# Altium PCB ESP32P4 SOM.PcbDoc (part 4 of 4)
Units mm, origin at the board's own origin, x right, y up, seen from the top; angles counter-clockwise.
Board outline 86.37 x 63.05 mm, 4 copper layers (L1-TOP, L2-GND, L3-GND/PWR, L4-BOT), stack 1.57 mm thick; 203 components, 172 nets, 736 pads, 1001 vias.
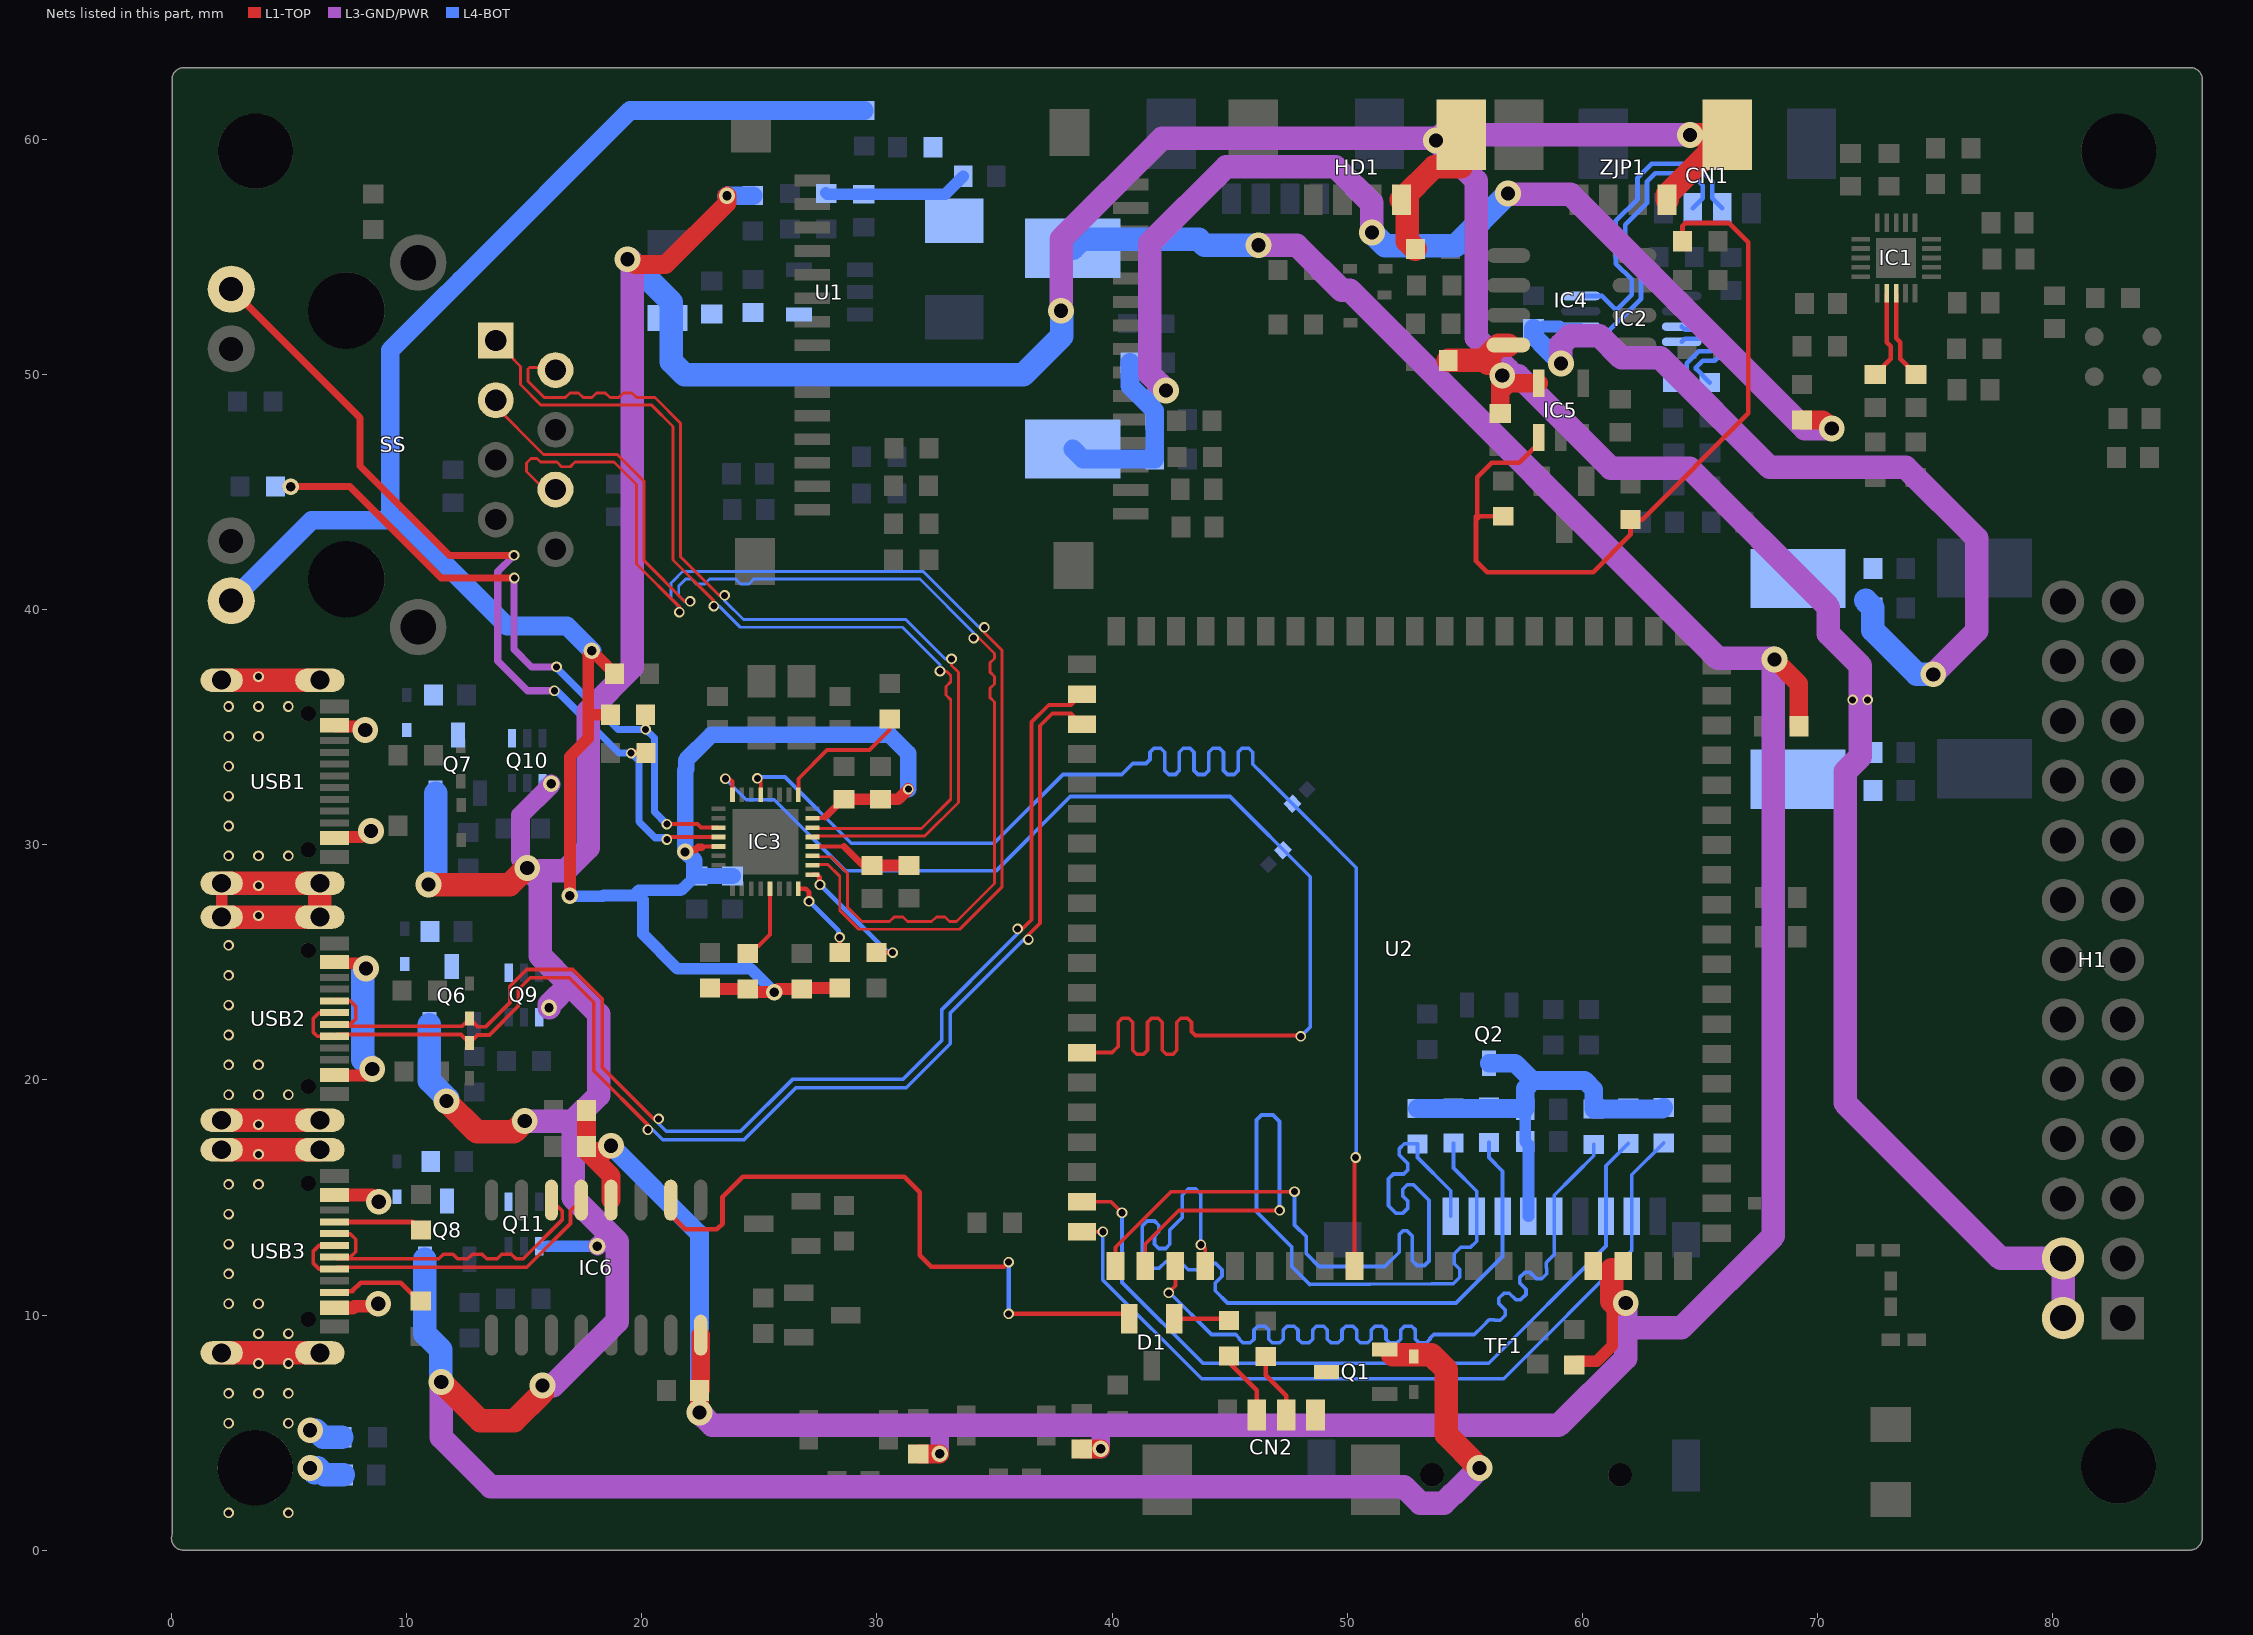
[diagram p6: the nets of this part, all layers, seen from the top]

## Via types
v1: diameter 0.45, hole 0.3, L1-TOP to L4-BOT, tented both sides, 789 vias
v2: diameter 0.7, hole 0.4, L1-TOP to L4-BOT, tented both sides, 101 vias
v3: diameter 1.1, hole 0.6, L1-TOP to L4-BOT, tented both sides, 75 vias
v4: diameter 0.45, hole 0.3, L1-TOP to L4-BOT, 33 vias
v5: diameter 0.4, hole 0.3, L1-TOP to L4-BOT, tented both sides, 2 vias
v6: diameter 1.1, hole 0.6, L1-TOP to L4-BOT, 1 vias

## Nets (pads, with @x,y where several pads share a name; then routed paths per layer and width w, separated by ;. In a path a pad name is that pad's centre, name@x,y a point inside that pad or via, vN(x,y) a via of type N, cw(c..) or ccw(c..) an arc to the next point about the centre after c; other vN are vias at no path point) (continued)
NetR68_2: R68.2 USB3.A5 | length 3.8
  L1-TOP w0.2: USB3.A5@6.934,13.96 10.267,13.96 R68.2@10.614,13.613
NetR70_2: R70.2 USB3.B5 | length 4.2
  L1-TOP w0.2: USB3.B5@6.934,10.96 7.454,11.01 7.669,11.01 cw(c8.133,10.298) 7.696,11.027 8.047,11.379 9.747,11.379 10.535,10.591 R70.2@10.607,10.591
OUT_N: C21.2 IC1.13 | length 3.8
  L1-TOP w0.2: IC1.13@73.346,53.455 73.346,51.539 73.521,51.364 73.521,50.66 C21.2@74.185,49.995
OUT_P: C22.2 IC1.12 | length 3.8
  L1-TOP w0.2: C22.2@72.456,49.995 73.121,50.66 73.121,51.198 72.946,51.373 IC1.12@72.946,53.455
PA_INL_N: IC2.4 R6.2 | length 4.3
  L4-BOT w0.2: R6.2@63.859,49.65 64.438,50.229 64.438,50.47 64.958,50.99 65.46,50.99 65.709,51.239 65.434,51.514 64.356,51.514 IC2.4@64.231,51.389
PA_INL_P: IC2.3 R8.2 | length 5
  L4-BOT w0.2: IC2.3@64.231,52.039 64.356,51.914 65.599,51.914 66.124,51.389 66.124,51.368 66.109,51.353 66.109,51.073 65.625,50.59 65.124,50.59 64.838,50.305 64.838,50.235 R8.2@65.417,49.656
PHY_3V3: C42.2 C43.2 C44.2 C45.2 IC3.13 IC3.31 R37.1 R38.2 R41.2 R42.2 R43.2 R44.2 R48.2 SS.12 | length 108.2
  L1-TOP w0.17: 22.57,29.894 22.605,29.93 IC3.13@23.259,29.93 ; IC3.31@27.259,31.129 27.756,31.129 27.801,31.175
  L1-TOP w0.3: v2(21.841,29.694) 21.917,29.771 22.278,29.771 22.401,29.894 22.57,29.894 ; 27.801,31.175 27.912,31.286 27.912,31.29 28.555,31.933 C42.2@28.605,31.933
  L1-TOP w0.5: v2(16.931,27.838) 16.945,27.853 16.945,33.743 17.723,34.521 17.723,38.086 v2(17.882,38.244) 18.833,37.293 R41.2@18.833,37.28 ; 17.901,35.53 R48.2@18.663,35.53 ; R44.2@22.903,23.91 22.943,23.87 R42.2@24.505,23.87 24.637,23.738 25.577,23.738 25.615,23.7 v2@25.638,23.723 ; v2(25.635,23.727) v2@25.638,23.723 ; R43.2@28.419,23.91 26.841,23.91 R38.2@26.802,23.87 25.786,23.87 v2@25.638,23.723 ; C42.2@28.605,31.933 C45.2@30.152,31.933 30.899,31.933 v1(31.336,32.37)
  L4-BOT w0.5: v2(16.931,27.838) 16.953,27.815 18.346,27.815 18.369,27.838 19.646,27.838 ; C43.2@22.291,28.672 21.741,28.122 21.704,28.122 21.652,28.07 19.878,28.07 19.646,27.838 ; v2(25.635,23.727) 24.631,24.731 21.52,24.731 20.056,26.194 20.056,27.66 19.878,27.838 19.646,27.838
  L4-BOT w0.7: v2(21.841,29.694) v2@21.864,29.717 ; C44.2@23.864,28.672 C43.2@22.341,28.672 22.291,28.672 22.241,28.722 22.241,29.34 v2@21.864,29.717 ; v1(31.336,32.37) 31.336,33.884 30.541,34.679 22.962,34.679 21.886,33.603 21.886,33.214 21.841,33.169 21.841,29.74 v2@21.864,29.717
  L4-BOT w0.8: SS.12@2.542,40.382 5.96,43.8 9.306,43.8 ; v2(17.882,38.244) 16.824,39.302 14.274,39.302 9.776,43.8 9.306,43.8 ; R37.1@29.466,61.233 19.509,61.233 12.292,54.016 12.292,54.012 11.238,52.957 11.233,52.957 9.306,51.03 9.306,43.8
PHY_AD0: IC3.11 R40.1 R48.1 | length 28.5
  L1-TOP w0.17: v1(21.066,30.875) 22.371,30.875 22.511,30.735 23.254,30.735 IC3.11@23.259,30.729
  L1-TOP w0.3: v2(5.078,45.232) 7.584,45.232 11.466,41.35 14.577,41.35 v1(14.58,41.347) ; v1(20.169,34.908) R48.1@20.169,35.53
  L3-GND/PWR w0.3: v1(14.58,41.347) 14.569,41.336 14.569,38.314 15.317,37.565 v1(16.376,37.565)
  L4-BOT w0.3: v1(16.376,37.565) 16.376,37.53 18.998,34.908 v1(20.169,34.908) 20.536,34.542 20.536,31.405 v1(21.066,30.875)
PHY_AD3: IC3.12 R46.1 SS.9 | length 37.4
  L1-TOP w0.17: v1(21.066,30.225) 21.171,30.329 IC3.12@23.259,30.329
  L1-TOP w0.3: SS.9@2.542,53.632 8.016,48.159 8.016,46.113 11.819,42.31 v1(14.569,42.31) ; v1(19.546,33.9) R46.1@20.179,33.9
  L3-GND/PWR w0.3: v1(14.569,42.31) 13.876,41.617 13.876,37.811 15.137,36.55 v1(16.282,36.55)
  L4-BOT w0.3: v1(16.282,36.55) 16.387,36.55 19.037,33.9 v1(19.546,33.9) 19.878,33.568 19.878,30.981 20.56,30.3 20.991,30.3 v1(21.066,30.225)
PHY_ISET: IC3.25 R47.2 | length 5.6
  L1-TOP w0.2: IC3.25@27.259,28.729 27.459,28.729 27.561,28.628 27.561,28.457 27.583,28.435 v1(27.583,28.3) ; R47.2@29.983,25.417 v1(30.67,25.417)
  L4-BOT w0.2: v1(27.583,28.3) 30.418,25.465 30.622,25.465 v1(30.67,25.417)
PHY_TESTON: IC3.24 R43.1 | length 3.6
  L1-TOP w0.2: IC3.24@26.659,28.129 26.969,28.129 27.115,27.984 v1(27.115,27.595) ; R43.1@28.419,25.417 v1(28.417,26.064)
  L4-BOT w0.2: v1(27.115,27.595) 28.369,26.341 28.369,26.112 v1(28.417,26.064)
RD_N: IC3.26 SS.6 | length 51.5
  L1-TOP w0.122: SS.6@16.332,45.107 15.869,45.107 15.1,45.876 15.1,46.241 15.284,46.425 15.542,46.425 15.691,46.275 16.332,46.275 16.393,46.275 16.593,46.075 16.959,46.075 17.159,46.275 17.881,46.275 18.825,46.275 19.779,45.321 19.779,41.942 21.598,40.123 v1(21.598,39.893) ; IC3.26@27.259,29.129 27.297,29.167 27.912,29.167 28.419,28.661 28.419,27.219 29.23,26.409 33.521,26.409 35.329,28.216 35.329,38.266 34.575,39.02 v1(34.575,39.25)
  L4-BOT w0.122: v1(21.598,39.893) 21.598,40.123 21.345,40.376 21.25,40.471 21.25,41.135 21.345,41.231 21.737,41.622 31.973,41.622 34.345,39.25 v1(34.575,39.25)
RD_P: IC3.27 SS.3 | length 51.1
  L1-TOP w0.122: SS.3@13.792,48.907 13.792,48.634 15.676,46.75 15.826,46.6 18.96,46.6 20.104,45.456 20.104,42.077 21.828,40.353 v1(22.058,40.353) ; IC3.27@27.259,29.53 27.297,29.492 28.047,29.492 28.744,28.795 28.744,27.354 29.364,26.734 30.478,26.734 30.539,26.734 30.739,26.934 31.105,26.934 31.305,26.734 31.903,26.734 32.268,26.734 32.329,26.734 32.529,26.934 32.895,26.934 33.095,26.734 33.387,26.734 35.004,28.351 35.004,28.465 35.004,36.014 35.004,36.075 34.804,36.275 34.804,36.641 35.004,36.841 35.004,37.098 35.004,37.159 34.804,37.359 34.804,37.725 35.004,37.925 35.004,38.103 35.004,38.131 34.345,38.79 v1(34.115,38.79)
  L4-BOT w0.122: v1(22.058,40.353) 21.828,40.353 21.575,40.606 21.575,41.001 21.871,41.297 22.058,41.297 22.119,41.297 22.319,41.097 22.685,41.097 22.885,41.297 23.159,41.297 23.936,41.297 23.997,41.297 24.197,41.097 24.563,41.097 24.763,41.297 24.941,41.297 31.838,41.297 34.115,39.02 v1(34.115,38.79)
RDGOUT: C40.2 C41.2 IC3.28 | length 4.4
  L1-TOP w0.17: IC3.28@27.259,29.93 28.605,29.93 ; C40.2@29.608,29.118 C40.2@29.788,29.118
  L1-TOP w0.3: 28.605,29.93 29.417,29.118 C40.2@29.608,29.118
  L1-TOP w0.5: C40.2@29.788,29.118 31.355,29.118 C41.2@31.36,29.122
RMII_TXD1: IC3.8 R77.1 U2.54 | length 53.5
  L1-TOP w0.156: v1(23.555,32.808) 23.741,32.808 23.859,32.689 IC3.8@23.859,32.129 ; U2.54@38.72,21.162 40.001,21.162 40.182,21.344 40.261,21.422 40.261,22.456 40.429,22.624 40.716,22.624 40.885,22.456 40.885,21.26 41.054,21.091 41.341,21.091 41.51,21.26 41.51,22.456 41.678,22.624 41.965,22.624 42.134,22.456 42.134,21.26 42.303,21.091 42.59,21.091 42.758,21.26 42.758,22.456 42.927,22.624 43.214,22.624 43.383,22.456 43.383,22.055 43.552,21.886 44.04,21.886 47.99,21.886 v1(48.026,21.85)
  L4-BOT w0.156: v1(23.555,32.808) 24.443,31.92 25.638,31.92 28.668,28.89 35.068,28.89 38.228,32.05 45.016,32.05 48.426,28.64 48.426,22.25 v1(48.026,21.85)
RMII_TXEN: IC3.5 R78.1 U2.69 | length 54.3
  L1-TOP w0.156: v1(24.921,32.822) 25.059,32.822 IC3.5@25.059,32.129 ; U2.69@50.31,12.082 50.31,16.653 v1(50.358,16.701)
  L4-BOT w0.156: v1(24.921,32.822) 25.008,32.822 25.066,32.88 26.093,32.88 28.913,30.06 34.986,30.06 37.912,32.986 40.412,32.986 40.88,33.454 41.369,33.454 41.447,33.454 41.616,33.623 41.616,33.938 41.784,34.107 42.072,34.107 42.24,33.938 42.24,33.155 42.409,32.986 42.696,32.986 42.865,33.155 42.865,33.938 43.033,34.107 43.321,34.107 43.489,33.938 43.489,33.155 43.658,32.986 43.945,32.986 44.114,33.155 44.114,33.938 44.282,34.107 44.57,34.107 44.738,33.938 44.738,33.155 44.907,32.986 45.194,32.986 45.363,33.155 45.363,33.938 45.531,34.107 45.818,34.107 45.987,33.938 45.987,33.429 46.449,32.967 47.675,31.741 48.291,31.125 50.389,29.027 50.389,16.731 v1(50.358,16.701)
RX0: CN2.2 R18.1 | length 3.4
  L1-TOP w0.2: R18.1@45.309,7.958 45.005,8.261 45.005,7.949 46.156,6.798 CN2.2@46.156,5.75
RX0_1: D1.1 R18.2 | length 2.4
  L1-TOP w0.2: D1.1@42.638,9.846 44.898,9.846 R18.2@44.977,9.768
RXER: IC3.21 R42.1 | length 3.2
  L1-TOP w0.17: R42.1@24.505,25.377 24.823,25.695 24.975,25.695 25.459,26.179 IC3.21@25.459,28.129
SD_CLK: R25.2 TF1.5 U2.63 | length 34.1
  L1-TOP w0.156: v1(42.412,10.944) 42.412,10.963 42.697,11.248 42.697,12.076 U2.63@42.69,12.082
  L4-BOT w0.156: v1(42.412,10.944) 42.461,10.944 44.234,9.17 44.676,9.17 45.258,9.17 45.414,9.014 45.414,8.976 45.57,8.82 45.882,8.82 46.038,8.976 46.038,9.364 46.194,9.52 46.506,9.52 46.662,9.364 46.662,8.976 46.818,8.82 47.13,8.82 47.286,8.976 47.286,9.364 47.442,9.52 47.754,9.52 47.91,9.364 47.91,8.976 48.066,8.82 48.378,8.82 48.534,8.976 48.534,9.364 48.69,9.52 49.002,9.52 49.158,9.364 49.158,8.976 49.314,8.82 49.626,8.82 49.782,8.976 49.782,9.364 49.938,9.52 50.25,9.52 50.406,9.364 50.406,8.976 50.562,8.82 50.874,8.82 51.03,8.976 51.03,9.364 51.186,9.52 51.498,9.52 51.654,9.364 51.654,8.976 51.81,8.82 52.122,8.82 52.278,8.976 52.278,9.364 52.434,9.52 52.746,9.52 52.902,9.364 52.902,8.976 53.058,8.82 53.37,8.82 53.526,8.976 53.526,9.014 53.682,9.17 53.76,9.17 55.406,9.17 55.765,9.529 56.037,9.801 56.258,9.801 56.285,9.775 56.506,9.775 56.726,9.995 56.726,10.216 56.452,10.49 56.452,10.711 56.672,10.931 56.893,10.931 57.167,10.657 57.388,10.657 57.609,10.878 57.609,11.098 57.334,11.373 57.334,11.593 57.555,11.814 57.775,11.814 58.05,11.539 58.27,11.539 58.491,11.76 58.491,11.981 58.464,12.008 58.464,12.228 58.519,12.283 58.808,12.572 TF1.5@58.808,14.203 58.808,15.1 59.648,15.94 60.484,16.777 R25.2@60.484,17.26
SD_CMD: R24.2 TF1.3 U2.64 | length 33.6
  L1-TOP w0.156: U2.64@43.96,12.082 43.96,12.84
  L4-BOT w0.156: v1(43.78,12.99) 43.78,15.135 43.557,15.358 43.252,15.358 42.984,15.09 42.984,14.144 42.461,13.621 42.461,13.014 42.28,12.833 41.989,12.833 41.809,13.013 41.809,13.365 41.987,13.542 41.987,13.822 41.809,14 41.501,14 41.284,13.784 41.284,12.232 41.518,11.998 42.008,11.998 42.28,12.27 42.904,12.27 43.245,11.929 43.711,11.929 43.972,12.19 44.415,12.19 44.676,11.929 44.676,11.65 44.387,11.361 44.387,11.033 44.91,10.51 54.625,10.51 56.608,12.493 TF1.3@56.608,14.203 56.608,16.12 56.03,16.698 R24.2@56.03,17.343
SD_DATA0: R27.2 TF1.7 U2.59 | length 33.7
  L1-TOP w0.156: U2.59@38.72,14.812 39.964,14.812 v1(40.426,14.35)
  L4-BOT w0.156: v1(40.426,14.35) 40.426,11.385 43.865,7.947 56.023,7.947 61.008,12.932 TF1.7@61.008,14.203 61.008,16.353 R27.2@61.951,17.296
SD_DATA1: R28.2 TF1.8 U2.60 | length 34.6
  L1-TOP w0.156: U2.60@38.72,13.542 v1(39.608,13.542)
  L4-BOT w0.156: v1(39.608,13.542) 39.608,11.495 43.811,7.293 56.659,7.293 62.108,12.742 TF1.8@62.108,14.203 62.108,15.964 R28.2@63.466,17.322
SD_DATA2: R21.2 TF1.1 U2.61 | length 33.8
  L1-TOP w0.156: U2.61@40.15,12.082 40.15,12.887 42.514,15.251 v1(47.762,15.251)
  L4-BOT w0.156: v1(47.762,15.251) 47.763,13.831 48.266,13.328 48.266,12.605 48.804,12.067 51.604,12.067 52.213,12.676 52.213,13.424 52.371,13.582 52.548,13.582 52.76,13.37 52.768,13.372 52.768,12.312 52.97,12.11 53.29,12.11 53.48,12.3 53.48,14.882 52.821,15.541 52.551,15.541 52.36,15.35 52.36,15.06 52.583,14.837 52.583,14.549 52.371,14.337 52.071,14.337 51.76,14.647 51.76,15.794 51.968,16.001 52.406,16.001 52.583,16.178 52.583,16.432 52.222,16.793 52.222,17.079 52.427,17.284 R21.2@52.995,17.284 52.995,16.701 54.408,15.288 TF1.1@54.408,14.203
SD_DATA3: R22.2 TF1.2 U2.62 | length 33.5
  L1-TOP w0.156: U2.62@41.42,12.082 41.42,13.037 42.834,14.45 v1(47.126,14.45)
  L4-BOT w0.156: v1(47.126,14.45) 47.126,18.234 46.85,18.51 46.36,18.51 46.146,18.296 46.146,14.398 47.645,12.898 47.645,12.067 48.411,11.302 53.6,11.333 54.513,11.333 54.79,11.61 54.79,11.953 54.56,12.183 54.56,12.61 54.83,12.88 55.25,12.88 55.508,13.138 TF1.2@55.508,14.203 55.508,15.268 54.523,16.253 R22.2@54.523,17.309
SHIELDGND: C7.2 Hole1.1 R80.2 USB1.1 USB1.2 USB1.3 USB1.4 USB2.1 USB2.2 USB2.3 USB2.4 USB3.1 USB3.2 USB3.3 USB3.4 | length 31.2
  L1-TOP w0.5: USB2.4@2.134,26.928 USB1.3@2.134,28.361
  L1-TOP w1: USB3.3@2.134,8.39 USB3.2@6.315,8.39 ; USB3.4@2.134,17.03 USB3.1@6.315,17.03 ; USB2.3@2.134,18.288 USB2.2@6.315,18.288 ; USB2.4@2.134,26.928 USB2.1@6.315,26.928 USB1.2@6.315,28.361 USB1.3@2.134,28.361 ; USB1.4@2.134,37.001 USB1.1@6.315,37.001
  L4-BOT w1: v3(5.9,5.1) 6.147,5.1 6.447,4.8 R80.2@7.247,4.8 ; v3@6.1,3.3 v3(5.9,3.5) 6.211,3.5 6.511,3.2 C7.2@7.311,3.2
  other v1: 2.431,1.59 4.971,1.59 2.431,5.4 4.971,5.4 2.431,6.67 3.701,6.67 4.971,6.67 3.701,7.94 4.971,7.94 3.701,9.21 4.971,9.21 2.431,10.48 3.701,10.48 2.431,11.75 2.431,13.02 2.431,14.29 2.431,15.56 3.701,15.56 3.701,16.83 3.701,18.1 2.431,19.37 3.701,19.37 4.971,19.37 2.431,20.64 3.701,20.64 2.431,21.91 2.431,23.18 2.431,24.45 2.431,25.72 3.701,26.99 3.701,28.26 2.431,29.53 3.701,29.53 4.971,29.53 2.431,30.8 2.431,32.07 2.431,33.34 2.431,34.61 3.701,34.61 2.431,35.88 3.701,35.88 4.971,35.88 3.701,37.15
SPEAKER_N: CN1.2 IC2.5 | length 12.8
  L4-BOT w0.2: IC2.5@59.939,51.389 60.665,51.389 62.5,53.224 62.5,54.208 61.826,54.882 61.826,56.366 62.749,57.289 62.749,58.198 63.11,58.559 64.611,58.559 65.124,58.047 65.124,57.494 CN1.2@64.699,57.069
SPEAKER_P: CN1.3 IC2.8 | length 13.3
  L4-BOT w0.2: IC2.8@59.939,53.339 60.837,53.339 61.378,52.798 61.508,52.798 62.1,53.39 62.1,54.043 61.426,54.717 61.426,56.532 62.349,57.455 62.349,58.364 62.944,58.959 64.777,58.959 65.524,58.213 65.524,57.494 CN1.3@65.949,57.069
TD_N: IC3.29 SS.2 | length 41.7
  L1-TOP w0.122: SS.2@16.332,50.187 16.22,50.3 15.226,50.3 15.163,50.237 15.163,49.713 15.856,49.02 16.688,49.02 16.749,49.02 16.949,49.22 17.315,49.22 17.515,49.02 17.576,49.02 17.82,49.02 17.881,49.02 18.081,49.22 18.447,49.22 18.647,49.02 18.813,49.02 18.96,49.02 19.021,49.02 19.221,49.22 19.587,49.22 19.787,49.02 20.036,49.02 20.563,49.02 21.653,47.93 21.653,42.249 23.297,40.606 v1(23.526,40.606) ; IC3.29@27.259,30.329 27.297,30.367 32.037,30.367 33.469,31.799 33.469,37.334 33.374,37.429 33.172,37.631 v1(33.172,37.908)
  L4-BOT w0.122: v1(23.526,40.606) 23.526,40.376 24.327,39.575 31.228,39.575 32.895,37.908 v1(33.172,37.908)
TD_P: IC3.30 SS.1 | length 41.2
  L1-TOP w0.122: SS.1@13.792,51.447 14.776,50.4 14.838,50.337 14.838,49.578 15.721,48.695 20.428,48.695 21.328,47.795 21.328,42.115 23.065,40.378 v1(23.065,40.148) ; IC3.30@27.259,30.729 27.297,30.692 31.903,30.692 33.144,31.933 33.144,36.11 33.144,36.171 32.944,36.371 32.944,36.737 33.144,36.937 33.144,37.199 32.962,37.381 v1(32.685,37.381)
  L4-BOT w0.122: v1(23.065,40.148) 23.295,40.148 24.192,39.25 31.093,39.25 32.685,37.658 v1(32.685,37.381)
TF_VCC: C30.2 C31.2 Q2.3 R21.1 R22.1 R24.1 R25.1 R27.1 R28.1 TF1.4 | length 19.3
  L4-BOT w0.5: C30.2@57.536,18.791 C30.2@57.576,18.751 C31.2@57.576,17.377 57.708,17.245 TF1.4@57.708,14.203
  L4-BOT w0.8: R21.1@52.995,18.791 C30.2@57.536,18.791 ; Q2.3@56.04,20.712 57.144,20.712 57.876,19.98 57.926,19.98 ; C30.2@57.576,18.791 57.576,19.63 57.926,19.98 ; R28.1@63.466,18.828 63.405,18.767 R25.1@60.484,18.767 60.484,19.592 60.096,19.98 57.926,19.98
TX0_BOOT: CN2.3 R17.1 | length 2.8
  L1-TOP w0.2: R17.1@46.532,8.232 46.534,8.23 46.534,7.442 47.406,6.57 CN2.3@47.406,5.75
TX1_1: IC5.1 R62.2 R65.2 R66.1 | length 34.3
  L1-TOP w0.2: R65.2@56.635,43.972 55.632,43.972 55.483,43.823 ; IC5.1@58.143,47.324 58.143,47.067 57.32,46.244 56.141,46.244 55.531,45.634 55.531,44.026 55.483,43.978 55.483,43.823 ; R62.2@64.261,55.661 64.261,56.324 64.379,56.441 66.247,56.441 67.063,55.625 67.063,48.349 62.544,43.831 R66.1@62.048,43.831 62.048,43.183 60.457,41.592 55.951,41.592 55.483,42.06 55.483,43.823
TXER: IC3.1 R45.1 | length 5.9
  L1-TOP w0.17: IC3.1@26.659,32.129 26.659,32.808 27.875,34.023 29.682,34.023 30.544,34.885 R45.1@30.544,35.356
U0_RX1: D1.2 IC6.2 | length 27.5
  L1-TOP w0.2: IC6.2@21.237,14.888 21.237,14.257 21.85,13.644 23.194,13.644 23.436,13.887 23.436,15.027 24.296,15.887 31.166,15.887 31.826,15.227 31.826,12.537 32.304,12.059 35.414,12.059 v1(35.604,12.25) ; v1(35.604,10.05) 40.535,10.05 D1.2@40.738,9.846
  L4-BOT w0.2: v1(35.604,10.05) v1(35.604,12.25)
USB1_5V: C59.2 D12.2 Q6.3 Q9.1 USB2.A4B9 USB2.B4A9 | length 7.7
  L1-TOP w0.5: USB2.B4A9@6.934,20.208 6.949,20.193 8.262,20.193 v3(8.537,20.469) ; USB2.A4B9@6.934,25.008 6.984,24.958 7.899,24.958 8.126,24.731 8.262,24.731 8.264,24.734 v3(8.27,24.734)
  L4-BOT w1: v3(8.27,24.734) 8.267,24.731 8.262,24.731 8.139,24.609 8.139,20.868 v3(8.537,20.469)
USB1P1_N: D8.1 U2.42 USB2.A7 USB2.B7 | length 54.3
  L1-TOP w0.155: USB2.B7@6.934,23.358 7.007,23.43 7.02,23.43 7.02,23.366 7.589,23.366 7.832,23.123 7.832,22.593 7.597,22.358 USB2.A7@6.934,22.358 7.005,22.287 12.355,22.287 D8.1@12.676,22.608 13.016,22.268 ; 13.016,22.268 13.376,22.268 14.396,23.288 14.396,23.982 15.112,24.698 17.064,24.698 18.314,23.449 18.314,20.542 20.515,18.34 v1(20.722,18.34) ; v1(35.985,26.422) 36.011,26.395 36.164,26.395 36.575,26.806 36.575,29.119
  L1-TOP w0.158: 36.575,29.119 36.575,35.216 37.306,35.948 38.266,35.948 U2.42@38.72,36.402
  L4-BOT w0.155: v1(20.722,18.34) 20.722,18.134 21.041,17.815 24.201,17.815 26.408,20.022 31.098,20.022 32.766,21.69 32.766,22.997 35.217,25.448 35.985,26.216 v1(35.985,26.422)
USB1P1_P: D9.1 U2.43 USB2.A6 USB2.B6 | length 54.3
  L1-TOP w0.155: USB2.A6@6.934,22.858 6.272,22.858 6.037,22.623 6.037,22.021 6.199,21.858 USB2.B6@6.934,21.858 7.005,21.929 12.317,21.929 12.422,21.824 D9.1@12.676,21.57 13.016,21.91 ; 13.016,21.91 13.524,21.91 14.754,23.14 14.754,23.833 15.261,24.34 16.916,24.34 17.956,23.3 17.956,20.393 20.262,18.087 v1(20.262,17.88) ; v1(36.444,25.963) 36.418,25.989 36.418,26.142 36.936,26.66 36.936,28.969
  L1-TOP w0.158: 36.936,28.969 36.936,35.067 37.456,35.587 38.266,35.587 U2.43@38.72,35.132
  L4-BOT w0.155: v1(20.262,17.88) 20.468,17.88 20.892,17.457 24.349,17.457 26.557,19.664 31.247,19.664 33.124,21.542 33.124,22.849 35.365,25.09 36.238,25.963 v1(36.444,25.963)
USB2_5V: C60.2 D11.2 Q7.3 Q10.1 USB1.A4B9 USB1.B4A9 | length 3.1
  L1-TOP w0.5: USB1.B4A9@6.934,30.281 6.984,30.331 8.068,30.331 8.318,30.581 v3(8.48,30.581) ; USB1.A4B9@6.934,35.081 6.984,35.031 7.929,35.031 8.08,34.881 v3(8.242,34.881)
USB3_5V: C58.2 D13.2 Q8.3 Q11.1 USB3.A4B9 USB3.B4A9 | length 3.9
  L1-TOP w0.55: USB3.B4A9@6.934,10.31 7.279,10.298 7.715,10.298 7.792,10.376 8.688,10.376 v3(8.793,10.481) ; USB3.A4B9@6.934,15.11 8.525,15.11 v3(8.815,14.819)
USB_5V: C5.2 C6.2 C8.2 C9.2 C52.1 C53.2 D2.2 D10.1 F3.1 H1.2 H1.4 HD1.1 HD1.6 IC4.8 IC5.5 Q1.2 Q6.2 Q7.2 Q8.2 Q9.4 Q10.4 Q11.4 R2.1 R63.1 U1.4 ZJP1.1 ZJP1.6 | length 296.8
  L1-TOP w0.8: v3(19.4,54.9) 19.5,54.8 19.6,54.8 19.72,54.68 21.014,54.68 23.626,57.292 v2(23.626,57.603) ; 56.075,50.471 v3(56.596,49.95) 56.508,49.862 56.508,49.284 ; C53.2@56.508,48.344 56.508,49.284 ; IC5.5@58.143,49.632 56.856,49.632 56.508,49.284
  L1-TOP w1: v3(10.926,28.318) 10.953,28.318 10.974,28.297 14.381,28.297 15.102,29.018 v3(15.129,29.018) ; v3(11.476,7.16) 13.131,5.506 14.582,5.506 15.776,6.7 v3(15.776,7) ; v3(11.691,19.096) 12.997,17.789 14.565,17.789 v3(15.026,18.25) ; Q1.2@51.95,8.32 53.57,8.32 54.21,7.68 54.21,4.916 v3(55.626,3.5) ; HD1.1@52.307,57.44 53.707,58.84 54.857,58.84 HD1.6@54.857,60.19 54.617,59.95 v3(53.776,59.95) ; HD1.1@52.562,57.428 52.562,55.674 R63.1@52.898,55.337 ; C52.1@54.3,50.6 55.8,50.6 56.453,51.253 IC4.8@56.856,51.253 ; 55.999,50.585 55.99,50.471 56.075,50.471 ; ZJP1.1@63.607,57.44 63.607,57.64 ZJP1.6@66.157,60.19 v3(64.576,60.19)
  L3-GND/PWR w0.8: v3(15.129,29.018) 15.129,29.099 14.844,29.384 14.844,31.259 16.145,32.561 v2(16.145,32.589) ; v2(18.113,12.924) v2@18.315,13.125
  L3-GND/PWR w1: v3(11.476,7.16) 11.476,4.8 13.576,2.7 52.414,2.7 53.111,2.003 54.105,2.003 54.452,2.35 54.476,2.35 v3(55.626,3.5) ; v3(15.026,18.25) 17.081,18.25 ; v3(15.129,29.018) 15.676,28.471 15.676,25.29 16.916,24.05 ; 15.676,28.891 16.744,28.891 17.723,29.871 17.723,35.67 19.6,37.546 19.6,54.781 19.481,54.9 v3(19.4,54.9) ; v3(15.776,7) 16.226,7 18.951,9.725 18.951,13.125 17.081,14.995 17.081,18.25 ; v2(16.057,23.07) 16.057,23.191 16.916,24.05 ; v3(37.835,52.71) 37.835,55.75 42.135,60.05 53.676,60.05 v3(53.776,59.95) ; v3(64.576,60.19) 54.016,60.19 v3(53.776,59.95) ; H1.2@80.447,9.868 H1.4@80.447,12.408 77.788,12.408 71.176,19.02 71.176,33.1 71.826,33.75 71.826,37.612 70.468,38.97 70.468,40.108 64.566,46.01 61.216,46.01 57.276,49.95 v3(56.596,49.95) 56.847,50.201 55.486,51.562 55.486,58.24 v3(53.776,59.95) ; 16.916,24.05 18.176,22.79 18.176,19.345 17.081,18.25
  L4-BOT w0.3: Q11.4@15.639,12.924 15.97,12.924 ; Q10.4@15.779,32.63 15.8,32.609 16.125,32.609 v2(16.145,32.589)
  L4-BOT w0.5: 15.97,12.924 v2(18.113,12.924)
  L4-BOT w0.8: v2(23.626,57.603) R2.1@24.726,57.603
  L4-BOT w1: Q8.2@10.776,12.375 10.776,9.215 11.457,8.534 11.457,7.18 v3(11.476,7.16) ; v3(10.926,28.318) 10.969,28.361 11.001,28.361 11.23,28.59 Q7.2@11.23,32.192 ; Q6.2@10.973,22.355 10.973,19.969 11.741,19.201 11.741,19.146 v3(11.691,19.096) ; v3(19.4,54.9) 19.431,54.9 19.55,54.781 19.55,54.76 19.96,54.35 19.986,54.35 21.255,53.081 21.255,50.551 21.826,49.98 36.215,49.98 37.869,51.634 37.869,52.676 v3(37.835,52.71)
  other v1: 71.496,36.16 72.136,36.16
USB_N: IC6.6 USB3.A7 USB3.B7 | length 14.4
  L1-TOP w0.155: USB3.B7@6.934,13.46 7.597,13.46 7.832,13.225 7.832,12.695 7.597,12.46 USB3.A7@6.934,12.46 7.005,12.389 11.292,12.389 11.369,12.389 11.569,12.589 11.969,12.589 12.169,12.389 12.382,12.389 12.529,12.389 12.606,12.389 12.806,12.589 13.206,12.589 13.406,12.389 13.617,12.389 13.773,12.389 13.851,12.389 14.051,12.589 14.451,12.589 14.651,12.389 14.904,12.389 14.962,12.389 16.613,14.04 16.613,14.432 IC6.6@16.157,14.888
USB_P: IC6.5 USB3.A6 USB3.B6 | length 14.5
  L1-TOP w0.155: USB3.A6@6.934,12.96 6.272,12.96 6.037,12.725 6.037,12.195 6.272,11.96 6.345,11.96 USB3.B6@6.934,11.96 7.005,12.031 15.111,12.031 15.47,12.389 16.972,13.891 16.972,14.432 IC6.5@17.427,14.888
VCC3V3: C2.2 C4.2 C55.1 C56.2 C57.2 F1.1 IC6.4 IC6.16 L1.2 R3.2 R5.1 R51.2 R52.2 R53.2 R54.2 U2.77 U2.78 | length 153.6
  L1-TOP w0.5: R51.2@59.654,7.882 59.808,8.035 60.618,8.035 61.276,8.693 61.276,10.571 61.285,10.571
  L1-TOP w0.8: C57.2@17.652,17.164 C56.2@17.652,18.699 ; IC6.4@18.697,14.888 18.697,15.919 17.652,16.964 18.462,16.964 v3(18.697,17.2) ; v3(22.457,5.861) C55.1@22.457,6.798 22.507,6.848 IC6.16@22.507,9.143 ; R53.2@31.766,4.087 32.663,4.087 v2(32.676,4.1) ; R52.2@38.716,4.307 v2(39.519,4.307) ; v3(68.174,37.883) 69.208,36.848 R54.2@69.208,35.039
  L1-TOP w1: 61.261,11.927 61.261,10.594 61.285,10.571 61.365,10.49 61.826,10.49 v3(61.846,10.51)
  L3-GND/PWR w0.8: v2(32.676,4.1) 32.676,5.314 ; v2(39.519,4.307) 39.519,5.314
  L3-GND/PWR w1: v3(22.457,5.861) 23.003,5.314 32.676,5.314 39.519,5.314 46.433,5.314 46.443,5.304 58.984,5.304 61.846,8.166 61.846,9.45 ; v3(46.233,55.499) 47.855,55.499 49.764,53.59 50.11,53.59 65.774,37.926 v3@68.126,37.926 ; v3(61.846,10.51) 61.846,9.45 ; v3(68.174,37.883) 68.13,37.926 v3@68.126,37.926 ; 61.846,9.45 64.211,9.45 68.126,13.365 v3@68.126,37.926
  L4-BOT w0.5: R3.2@27.823,57.731 R3.2@27.85,57.704 27.891,57.663 C2.2@29.442,57.663 32.909,57.663 C4.2@33.675,58.428
  L4-BOT w0.8: v3(18.697,17.2) 22.457,13.441 v3(22.457,5.861)
  L4-BOT w1: F1.1@38.333,55.374 38.709,55.75 43.683,55.75 43.934,55.499 v3(46.233,55.499)
VCC5VA: C10.1 C11.2 C25.2 F3.2 IC2.6 | length 37
  L3-GND/PWR w1: v3(59.093,50.475) 59.093,51.267 59.473,51.647 60.73,51.647 61.671,50.705 63.321,50.705 67.976,46.05 73.76,46.05 76.776,43.034 76.776,39.1 v3(74.926,37.25)
  L4-BOT w0.3: 59.031,52.039 IC2.6@59.939,52.039
  L4-BOT w0.5: C25.2@58.364,52.039 59.031,52.039
  L4-BOT w0.8: C25.2@57.926,51.95 57.926,51.642 58.493,51.075 58.493,51.065 58.951,50.607 58.961,50.607 v3(59.093,50.475)
  L4-BOT w1: C11.2@72.046,40.392 72.359,40.08 C11.2@72.359,40.063 72.359,39.121 74.23,37.25 v3(74.926,37.25)
VDDA: C1.2 C3.2 F1.2 R1.2 R16.1 | length 54.7
  L1-TOP w0.8: R16.1@69.346,48.069 70.239,48.069 v3(70.607,47.7)
  L3-GND/PWR w1: v3(42.296,49.316) 41.606,50.006 41.606,55.59 44.856,58.84 49.493,58.84 51.037,57.296 51.037,56.059 v3(51.056,56.04) ; v3(56.836,57.69) 56.855,57.671 59.491,57.671 69.462,47.7 v3(70.607,47.7)
  L4-BOT w0.8: F1.2@38.333,46.834 38.76,46.407 C1.2@41.816,46.407 C3.2@41.816,48.082 41.816,48.46 41.484,48.792 ; R1.2@40.763,50.506 40.763,49.513 41.484,48.792 ; v3(42.296,49.316) 42.238,49.259 41.951,49.259 41.484,48.792
  L4-BOT w1: v3(51.056,56.04) 51.629,55.467 54.603,55.467 56.826,57.69 v3(56.836,57.69)
VIN: CN2.4 Q1.3
pads on no net: ANT1.1 IC3.6 IC3.7 IC3.15 IC3.16 IC6.7 IC6.8 IC6.9 IC6.10 IC6.11 IC6.12 IC6.15 SS. SS.7 TF1. TF1.9 U2.10 U2.22 U2.23 U2.24 USB1. USB1.A8 USB1.B8 USB2. USB2.A8 USB2.B8 USB3. USB3.A8 USB3.B8

## Polygon pours and split planes (outlines as drawn)
GND on L3-GND/PWR "NONET_L-01_P-001" (solid, pour order 29): 0.232,0.239 0.232,63.339 86.604,63.339 86.604,0.239
AGND on L3-GND/PWR "NONET_L-01_P-001" (solid, pour order 16): 58.126,63.1 58.126,58.319 59.952,56.19 57.926,53.894 57.926,51.505 57.926,50.87 58.883,49.913 60.599,49.913 61.898,48.615 61.898,46.838 62.017,46.719 64.86,46.719 67.864,43.715 70.109,43.715 71.8,42.025 71.8,38.776 71.804,38.776 73.952,36.628 76.376,36.628 78.437,38.689 78.437,40.03 79.931,41.524 79.931,43.25 86.372,43.25 86.372,63.1
GND on L3-GND/PWR "NONET_L-01_P-001" (solid, pour order 35): 57.613,61.841 65.299,61.841 65.329,61.811 65.329,59.56 57.613,59.56
SHIELDGND on L3-GND/PWR "NONET_L-01_P-001" (solid, remove dead copper, pour order 25): 0.52,38.528 4.045,38.503 7.57,38.478 7.57,37.029 7.595,36.828 7.62,36.628 6.965,36.118 6.309,35.609 5.192,35.579 3.918,34.305 3.918,30.448 6.79,28.855 6.79,26.2 3.918,25.747 3.918,20.787 6.79,18.769 6.79,16.285 6.126,15.762 4.905,15.762 3.918,14.775 3.918,11.323 5.727,9.488 6.72,9.085 6.72,0.028 -0.006,0.028 -0.006,38.528 0.522,38.528
AGND on L2-GND "NONET_L-01_P-001" (solid, pour order 34): 58.126,63.1 58.126,58.319 59.952,56.19 57.926,53.894 57.926,51.505 57.926,50.87 58.883,49.913 60.599,49.913 61.898,48.615 61.898,46.838 62.017,46.719 64.86,46.719 67.864,43.715 70.109,43.715 71.8,42.025 71.8,38.776 71.804,38.776 73.952,36.628 76.376,36.628 78.437,38.689 78.437,40.03 79.931,41.524 79.931,43.25 86.372,43.25 86.372,63.1
GND on L2-GND "NONET_L-01_P-001" (solid, pour order 30): 0,0 0,63.1 86.372,63.1 86.372,0
SHIELDGND on L2-GND "NONET_L-01_P-001" (solid, remove dead copper, pour order 21): 0.52,38.528 4.045,38.503 7.57,38.478 7.57,37.029 7.595,36.828 7.62,36.628 6.965,36.118 6.309,35.609 5.192,35.579 3.918,34.305 3.918,30.448 6.79,28.855 6.79,26.2 3.918,25.747 3.918,20.787 6.79,18.769 6.79,16.285 6.126,15.762 4.905,15.762 3.918,14.775 3.918,11.323 5.727,9.488 6.72,9.085 6.72,0.028 -0.006,0.028 -0.006,38.528 0.522,38.528
GND on L4-BOT "NONET_L-01_P-001" (solid, pour order 31): 0,0 0,63.1 86.372,63.1 86.372,0
AGND on L4-BOT "NONET_L-01_P-001" (solid, pour order 32): 58.126,63.1 58.126,58.319 59.952,56.19 57.926,53.894 57.926,51.505 57.926,50.87 58.883,49.913 60.599,49.913 61.898,48.615 61.898,46.838 62.017,46.719 64.86,46.719 67.864,43.715 70.109,43.715 71.8,42.025 71.8,38.776 71.804,38.776 73.952,36.628 76.376,36.628 78.437,38.689 78.437,40.03 79.931,41.524 79.931,43.25 86.372,43.25 86.372,63.1
SHIELDGND on L4-BOT "NONET_L-01_P-001" (solid, remove dead copper, pour order 26): 0.52,38.528 4.045,38.503 7.57,38.478 7.57,37.029 7.595,36.828 7.62,36.628 6.965,36.118 6.309,35.609 5.192,35.579 3.918,34.305 3.918,30.446 6.79,28.852 6.79,26.2 3.918,25.747 3.918,20.787 6.79,18.769 6.79,16.285 6.126,15.762 4.905,15.762 3.918,14.775 3.918,11.323 5.727,9.488 6.72,9.085 6.72,0.028 -0.006,0.028 -0.006,38.528 0.522,38.528
GND on L1-TOP "NONET_L-01_P-001" (solid, pour order 12): 0,0 0,63.1 86.372,63.1 86.372,0
AGND on L1-TOP "NONET_L-01_P-001" (solid, pour order 36): 58.126,63.1 58.126,58.319 59.952,56.19 57.926,53.894 57.926,51.505 57.926,50.87 58.883,49.913 60.599,49.913 61.898,48.615 61.898,46.838 62.017,46.719 64.86,46.719 67.864,43.715 70.109,43.715 71.8,42.025 71.8,38.776 71.804,38.776 73.952,36.628 76.376,36.628 78.437,38.689 78.437,40.03 79.931,41.524 79.931,43.25 86.372,43.25 86.372,63.1
SHIELDGND on L1-TOP "NONET_L-01_P-001" (solid, remove dead copper, pour order 27): 0.52,38.528 4.045,38.503 7.57,38.478 7.57,37.029 7.595,36.828 7.62,36.628 6.965,36.118 6.309,35.609 5.192,35.579 3.918,34.305 3.918,30.446 6.79,28.852 6.79,26.2 3.918,25.747 3.918,20.787 6.79,18.769 6.79,16.285 6.126,15.762 4.905,15.762 3.918,14.775 3.918,11.323 5.727,9.488 6.72,9.085 6.72,0.028 -0.006,0.028 -0.006,38.528 0.522,38.528

## Keep-outs
Keep-Out Layer:
  lines w1: 0.501,0.504 85.845,0.504 ; 0.526,0.55 0.526,62.55 85.87,62.55 85.87,0.55

## Other copper
L1-TOP:
  pour cut-out: 65.024,38.149 64.889,38.284 64.889,38.802 71.725,38.802 72.299,38.228 72.299,38.149
  region net VIN: 48.2,5.1 48.2,8 49.5,8 49.7,7.8 49.7,5.1
  pour cut-out: 14.754,43.045 14.754,42.67 12.726,42.67 12.726,43.421 14.378,43.421
  pour cut-out: 12.726,46.773 12.726,48.501 12.76,48.534 13.511,48.534 15.195,46.85 15.195,46.698 14.947,46.449 14.81,46.449 14.754,46.505 14.754,46.677 14.165,47.266 13.327,47.266 12.893,46.833 12.893,46.74 12.76,46.74
  pour cut-out: 56.11,58.487 56.11,55.525 55.486,54.901 55.486,54.097 55.063,54.097 55.061,54.094 54.91,54.245 54.91,58.147 55.77,58.147
  pour cut-out: 55.037,58.147 55.037,54.117 54.138,55.017 53.527,55.017 53.271,55.272 53.271,56.508 54.91,58.147
  pour cut-out: 20.423,8.362 20.782,8.362 20.782,9.698 20.745,9.736 20.46,9.736 20.423,9.698
  pour cut-out: 53.088,24.509 53.158,24.579 53.158,24.679 62.939,24.679 62.939,24.304 62.694,24.059 62.575,24.178 53.418,24.178
  pour cut-out: 53.711,32.222 53.626,32.137 53.626,31.632 39.644,31.632 39.524,31.752 39.524,32.283 53.479,32.283 53.541,32.222
  pour cut-out: 54.415,12.886 54.415,17.968 55.238,17.968 57.617,15.59 57.617,12.886
  pour cut-out: 73.956,36.641 71.909,34.595 71.909,33.887 68.881,33.887 68.881,38.133 72.465,38.133
  pour cut-out: 66.588,35.326 66.631,35.369 68.632,35.369 68.632,37.864 68.452,38.045 66.674,38.045 66.483,37.853 66.579,37.758 66.579,35.332
  pour cut-out: 68.765,34.414 68.77,34.409 68.77,33.871 68.288,33.871 68.266,33.873 68.266,34.4 68.75,34.4
  pour cut-out: 80.873,36.296 80.873,36.78 80.063,36.78 79.77,36.486 79.77,36.15 80.728,36.15
  pour cut-out: 81.124,34.385 81.124,33.61 80.166,33.61 80.021,33.756 80.036,33.771 80.036,34.076 80.345,34.385
  pour cut-out: 83.132,18.924 83.132,18.591 83.057,18.516 82.561,18.516 82.466,18.611 82.466,18.8 82.591,18.924
  pour cut-out: 82.561,21.056 82.337,21.28 82.337,21.295 82.507,21.464 83.132,21.464 83.132,21.131 83.057,21.056
  pour cut-out: 83.132,23.671 83.132,24.004 82.59,24.004 82.31,23.724 82.31,23.45 82.912,23.45
  pour cut-out: 83.044,26.588 83.086,26.546 83.086,26.205 82.527,26.205 82.517,26.194 82.517,26.458 82.874,26.458 83.029,26.613
  pour cut-out: 62.477,6.111 62.449,6.082 62.449,5.773 62.086,5.773 62.084,5.771 62.076,5.778 62.076,6.067 62.418,6.067 62.457,6.105
  pour cut-out: 9.98,9.988 9.947,9.988 9.288,9.328 8.987,9.629 8.987,9.823 9.32,10.156 10.019,10.156
  pour cut-out: 25.42,23.226 25.579,23.068 25.579,22.126 25.4,21.947 24.254,21.947 24.254,23.221 24.264,23.231 24.269,23.226 25.4,23.226
  pour cut-out: 28.976,25.158 28.98,25.163 29.423,25.163 29.423,24.945 29.396,24.918 29.021,24.918 28.976,24.963
  pour cut-out: 27.437,24.865 27.834,24.865 27.834,25.021 27.758,25.097 27.37,25.097 27.37,24.931
  pour cut-out: 25.139,24.789 25.142,24.786 25.142,24.429 24.312,24.429 24.303,24.42 24.303,24.849 25.094,24.849 25.151,24.792
  pour cut-out: 27.347,27.219 27.347,26.473 27.798,26.022 27.92,26.022 27.99,26.092 27.99,26.579 27.35,27.219
  pour cut-out: 29.179,31.333 29.179,30.966 29.169,30.956 28.973,30.956 28.973,31.337 28.974,31.336 29.182,31.336
  pour cut-out: 30.105,43.016 30.105,42.763 30.111,42.757 30.274,42.757 30.274,43.007 30.269,43.012 30.108,43.012
  pour cut-out: 32.811,45.909 32.811,46.206 32.833,46.227 32.514,46.227 32.514,45.909
  pour cut-out: 31.62,47.498 31.525,47.498 31.332,47.691 31.326,47.686 31.326,46.227 31.62,46.227
  pour cut-out: 32.811,44.645 32.811,44.286 32.785,44.259 32.464,44.259 32.464,44.645 32.462,44.647
  pour cut-out: 75.66,36.628 75.622,36.666 75.622,38.409 72.683,38.409 72.453,38.179 72.453,38.127 73.952,36.628
  pour cut-out: 74.827,38.003 74.827,38.257 74.742,38.342 74.56,38.342 74.56,38.027 74.635,37.952 74.776,37.952
  pour cut-out: 62.96,58.293 62.96,59.732 64.006,59.732 64.278,59.46 64.278,59.314 64.204,59.314 63.184,58.293
  pour cut-out: 59.142,59.737 63.964,59.737 63.973,59.728 64.904,60.659 64.904,61.841 58.86,61.841 58.86,60.07 59.142,59.788
  pour cut-out: 77.987,57.104 78.18,57.104 78.18,56.79 77.987,56.79
  pour cut-out: 74.821,47.734 74.839,47.752 74.839,47.992 74.549,47.992 74.549,47.734
  pour cut-out: 73.091,47.734 73.109,47.752 73.109,47.992 72.819,47.992 72.819,47.734
  pour cut-out: 73.55,47.734 73.532,47.752 73.532,47.992 73.822,47.992 73.822,47.734
  pour cut-out: 71.821,47.734 71.803,47.752 71.803,47.992 72.093,47.992 72.093,47.734
  pour cut-out: 73.091,46.228 73.55,46.228 73.55,45.495 73.386,45.331 73.256,45.331 73.091,45.495
  pour cut-out: 74.839,49.392 75.322,49.392 75.38,49.449 75.38,49.789 74.996,50.173 74.904,50.173 74.839,50.108
  pour cut-out: 73.109,49.392 73.532,49.392 73.532,50.211 73.321,50.423 73.109,50.211 73.109,50.205
  pour cut-out: 64.39,46.88 63.774,47.496 63.438,47.496 63.438,47.432 62.883,46.876 62.883,46.784 62.948,46.719 64.244,46.719 64.363,46.838 64.377,46.838
  pour cut-out: 65.25,47.73 65.199,47.73 64.538,48.391 65.966,49.818 65.966,50.449 66.354,50.449 66.354,48.663 65.417,47.726
  pour cut-out: 59.247,55.44 60.237,55.44 60.24,55.436 60.24,55.822 59.629,55.822
  pour cut-out: 57.962,52.32 57.978,52.304 60.217,52.304 60.217,51.188 58.067,51.188 57.962,51.293
  pour cut-out: 61.29,54.52 61.29,53.549 63.278,51.562 64.79,51.562 64.947,51.72 64.947,53.304 64.868,53.383 64.459,53.383 63.177,54.666 61.436,54.666
  pour cut-out: 83.537,42.737 83.445,42.645 83.445,42.469 80.534,42.469 80.444,42.559 80.444,42.737
  region net USB_5V: 50.8,8.9 52.9,8.9 52.9,7.8 50.8,7.8
  pour cut-out: 67.026,8.05 67.026,0.55 80.68,0.55 80.68,8.05
  pour cut-out: 12.726,56.647 12.726,37.773 0.026,37.827 0.026,56.701
  region net VCC3V3: 62.116,11.48 62.116,12.69 60.096,12.69 60.096,11.48
  region net ESP_3V3: 40.226,45.27 42.436,45.27 42.676,45.51 43.699,45.51 43.699,43 40.843,43 40.226,43.617
  region net NetC19_2: 74.056,53.85 74.056,53.05 75.016,53.05 75.506,52.56 75.506,50.67 75.516,50.66 76.336,50.66 76.336,53.48 75.966,53.85
  region net NetC27_1: 72.64,53.849 70.436,53.849 70.436,50.76 71.256,50.76 71.256,52.879 71.397,53.019 72.64,53.019
  region net CODEC_3V3: 73.436,56.05 73.436,57.53 73.506,57.6 73.506,58.41 70.936,58.41 70.936,57.57 72.336,57.57 72.85,57.056 72.85,56.05
L3-GND/PWR:
  pour cut-out: 53.427,58.24 53.437,58.25 53.437,57.519 53.325,57.407 53.252,57.48 51.722,57.48 50.962,58.24
  pour cut-out: 68.534,43.045 68.534,43.137 68.599,43.202 69.897,43.202 71.287,41.812 71.287,40.413 71.117,40.462
  pour cut-out: 55.47,59.481 57.613,59.481 57.613,58.38 57.514,58.281 56.361,58.281 55.47,59.172
  pour cut-out: 57.926,52.699 58.636,51.99 58.79,51.99 58.79,51.647 57.926,51.647
  pour cut-out: 67.026,8.05 67.026,0.55 80.68,0.55 80.68,8.05
  pour cut-out: 12.726,56.647 12.726,37.773 0.026,37.827 0.026,56.701
L2-GND:
  pour cut-out: 67.026,8.05 67.026,0.55 80.68,0.55 80.68,8.05
  pour cut-out: 12.726,56.647 12.726,37.773 0.026,37.827 0.026,56.701
L4-BOT:
  pour cut-out: 75.516,24.438 64.739,24.438 64.739,24.74 75.516,24.74
  region net USB1_5V: 10.126,25.23 9.716,25.23 9.396,25.55 10.596,25.55 10.596,26.77 11.381,26.77 11.426,26.725 11.426,25.766 11.423,25.763 11.815,25.37 14.106,25.37 14.518,24.958 14.518,24.17 10.126,24.17
  pour cut-out: 68.006,19.636 67.906,19.736 67.906,20.371 72.671,20.371 72.991,20.052 72.574,19.636
  pour cut-out: 68.252,19.041 68.775,19.041 68.846,18.97 68.846,18.871 65.92,15.945 65.92,9.845 65.841,9.845 65.75,9.936 65.75,16.539
  pour cut-out: 5.927,13.826 6.002,13.902 6.08,13.902 6.246,14.067 7.167,14.067 7.279,13.956 7.279,11.179 7.184,11.085 6.954,11.085 5.927,12.111 5.927,12.147
  pour cut-out: 5.927,24.03 6.088,24.19 7.146,24.19 7.249,24.087 7.249,21.102 7.147,21 6.758,21 5.927,21.831
  pour cut-out: 5.927,31.629 5.927,33.472 6.354,33.899 7.302,33.899 7.418,33.783 7.418,30.997 7.352,30.931 6.625,30.931
  pour cut-out: 64.155,54.363 63.152,54.363 62.967,54.178 63.058,54.088 63.058,53.561 63.353,53.561
  pour cut-out: 64.095,57.922 64.1,57.927 64.1,58.25 64.484,58.25 64.655,58.079 64.655,57.987 64.589,57.922
  pour cut-out: 65.726,47.543 65.726,47.261 66.089,47.261 66.089,47.507 66.052,47.543
  pour cut-out: 63.237,47.261 63.237,47.524 63.224,47.537 63.55,47.537 63.55,47.261
  pour cut-out: 64.782,47.261 64.544,47.261 64.544,46.719 64.782,46.719
  pour cut-out: 64.495,49.044 64.5,49.05 64.782,49.05 64.782,49.848 64.717,49.913 64.601,49.913 64.495,49.807
  region net AGND: 66.48,43.27 66.48,45.1 67.88,43.7 67.459,43.27 67.34,43.27
  pour cut-out: 27.628,27.526 27.752,27.65 27.801,27.65 30.216,25.235 30.216,25.193 30.056,25.034 28.82,25.034 28.387,25.466 28.845,25.924 28.845,26.309
  pour cut-out: 66.884,28.435 67.054,28.265 67.054,27.452 66.447,27.452 66.404,27.409 66.404,27.956
  pour cut-out: 60.498,38.687 61.007,38.687 61.007,39.87 61.022,39.886 60.828,40.079 60.79,40.079 60.498,39.788
  pour cut-out: 64.812,35.569 65.122,35.569 65.122,39.174 65.047,39.25 64.947,39.25 64.812,39.114
  pour cut-out: 63.769,37.187 63.769,38.955 64.047,39.234 64.146,39.234 64.225,39.155 64.225,37.19 63.771,37.19
  pour cut-out: 62.458,36.733 62.432,36.758 62.432,42.076 63.418,43.062 63.844,43.062 64.985,41.922 62.628,39.565 62.628,36.835 62.526,36.733
  pour cut-out: 61.295,13.2 61.822,13.2 61.822,12.861 56.54,7.58 56.285,7.58 56.231,7.634 56.231,8.136
  pour cut-out: 41.39,14.81 41.39,14.266 41.686,13.97 42.404,13.97 42.697,14.263 42.697,14.96 42.627,15.03 41.609,15.03 41.392,14.813
  pour cut-out: 48.952,20.862 49.364,20.862 49.364,18.628 48.38,17.644 48.329,17.644 48.16,17.813 48.952,18.604
  pour cut-out: 38.195,24.213 37.91,24.498 37.91,25.09 37.925,25.09 38.924,26.089 39.354,26.089 39.457,25.986 39.457,25.474 39.078,25.096
  pour cut-out: 52.465,17.891 52.369,17.987 52.369,18.129 52.425,18.184 52.433,18.176 56.914,18.176 56.973,18.117 56.973,17.182 53.63,17.182 53.63,17.891
  pour cut-out: 47.072,12.779 47.292,12.779 47.292,12.047 48.303,11.036 48.313,11.046 54.448,11.046 54.448,10.816 54.467,10.797 47.148,10.797 46.935,11.009 46.935,12.642
  pour cut-out: 47.97,12.148 47.97,12.236 48.037,12.303 48.281,12.303 48.804,11.78 48.826,11.802 51.744,11.802 52.311,12.369 52.415,12.369 52.939,11.845 53.4,11.845 53.767,12.212 53.767,13.111 53.855,13.2 54.504,13.2 54.574,13.129 54.574,12.911 54.273,12.61 54.273,12.064 54.503,11.834 54.503,11.729 54.364,11.589 48.529,11.589
  pour cut-out: 67.026,8.05 67.026,0.55 80.68,0.55 80.68,8.05
  pour cut-out: 12.726,56.647 12.726,37.773 0.026,37.827 0.026,56.701
  region net VCC3V3: 40.366,54.11 40.356,54.1 31.97,54.1 31.97,60.349 34.266,60.349 34.266,57.76 35.386,56.64 40.366,56.64
  region net VCC5VA: 67.146,42.59 72.386,42.59 72.766,42.21 72.766,39.6 67.386,39.6 67.146,39.85 67.146,39.86
  region net VDDA: 36.216,48.11 41.006,48.11 41.167,48.271 42.296,48.271 42.296,46.02 41.826,45.55 36.216,45.55
  region net USB_5V: 27.306,53.05 20.377,53.05 20.377,50.67 23.426,50.67 23.426,50.883 24.213,51.67 27.306,51.67
  region net USB_5V: 67.136,36.567 72.766,36.567 72.766,31.85 72.436,31.52 67.136,31.52
  region net ESP_3V3: 29.026,60.45 29.026,59.11 31.296,59.11 31.336,59.15 31.336,60.46 31.326,60.45
  region net NetL1_1: 28.726,52.86 28.726,52.26 29.496,51.49 34.546,51.49 34.546,53.39 34.526,53.39 30.826,53.39 30.296,52.86
  region net USB2_5V: 10.282,35.233 9.872,35.233 9.552,35.553 10.752,35.553 10.752,36.773 11.562,36.773 11.582,36.753 11.582,35.77 11.578,35.766 11.971,35.373 14.262,35.373 14.674,34.961 14.674,34.173 10.282,34.173
  region net USB2_5V: 10.295,35.233 9.885,35.233 9.565,35.553 7.915,35.553 7.625,35.263 7.625,30.236 10.295,30.236
  region net USB3_5V: 9.931,15.4 9.746,15.4 9.426,15.72 10.626,15.72 10.626,16.94 11.436,16.94 11.456,16.92 11.456,15.936 11.453,15.933 11.845,15.54 14.513,15.54 14.512,14.34 9.931,14.34
  region net USB3_5V: 10.026,15.4 9.746,15.4 9.426,15.72 7.776,15.72 7.486,15.43 7.486,9.8 7.516,9.77 10.026,9.77
  region net USB1_5V: 10.126,25.23 9.716,25.23 9.396,25.55 7.746,25.55 7.456,25.26 7.456,19.63 7.486,19.6 10.136,19.6 10.126,19.61

## Dimensions
3.574,59.502 to 3.566,3.509 on Mechanical 10
3.574,59.502 to 82.822,59.497 on Mechanical 10

## Text inside footprints (layer, text, board x,y; h text height)
SS: Mechanical 2 "13" at 11.066,53.957 h1.2 r90; Mechanical 2 "8" at 16.866,42.157 h1.2 r90; Mechanical 2 "7" at 14.416,43.457 h1.2 r90; Mechanical 2 "6" at 16.916,44.657 h1.2 r90; Mechanical 2 "5" at 14.416,45.957 h1.2 r90; Mechanical 2 "4" at 16.866,47.157 h1.2 r90; Mechanical 2 "3" at 14.366,48.557 h1.2 r90; Mechanical 2 "2" at 16.916,49.807 h1.2 r90; Mechanical 2 "1" at 14.416,51.257 h1.2 r90; Mechanical 2 "9" at 3.116,53.207 h1.2 r90; Mechanical 2 "10" at 3.116,50.207 h1.2 r90; Mechanical 2 "11" at 3.116,42.257 h1.2 r90; Mechanical 2 "12" at 3.116,39.557 h1.2 r90; Mechanical 2 "14" at 11.066,38.357 h1.2 r90